# EAGLE board pro-one-oscillators (EAGLE 5.07)

Size 100 x 80 mm. Coordinates in mm from the lower left corner, seen from the top.
Outline: 0,0 100,0 100,80 0,80 0,0
Copper layers (1*16): Top 0.035mm / dielectric 1.5mm / Bottom 0.035mm
Design rules "default": minimum track width 10mil, minimum drill 24mil, track to track 8mil, track to pad 8mil, pad to pad 8mil, via to via 8mil, smd to smd 8mil, copper to edge 40mil, drill to drill 8mil, minimum pad ring 10mil, minimum via ring 8mil, stop-mask expansion 4mil, vias tented up to drill 0mil, thermal gap 10mil

## Footprints (pad centres in the part's own frame; a part is rotated, then mirrored left to right if it is on the bottom)
C050-025X075 = drill 0.813 octagon: 1 -2.54,0; 2 2.54,0
DO35-7 = drill 0.813 long: A 3.81,0; C -3.81,0
DIL16 = drill 0.813 long: 1 -8.89,-3.81; 2 -6.35,-3.81; 3 -3.81,-3.81; 4 -1.27,-3.81; 5 1.27,-3.81; 6 3.81,-3.81; 7 6.35,-3.81; 8 8.89,-3.81; 9 8.89,3.81; 10 6.35,3.81; 11 3.81,3.81; 12 1.27,3.81; 13 -1.27,3.81; 14 -3.81,3.81; 15 -6.35,3.81; 16 -8.89,3.81
DIL14 = drill 0.813 long: 1 -7.62,-3.81; 2 -5.08,-3.81; 3 -2.54,-3.81; 4 0,-3.81; 5 2.54,-3.81; 6 5.08,-3.81; 7 7.62,-3.81; 8 7.62,3.81; 9 5.08,3.81; 10 2.54,3.81; 11 0,3.81; 12 -2.54,3.81; 13 -5.08,3.81; 14 -7.62,3.81
0309/10 = drill 0.813 octagon: 1 -5.08,0; 2 5.08,0
RTRIM64W = drill 0.61 round: 1 1.27,-2.54; 2 1.27,0; 3 1.27,2.54
255SB = drill 1.118 long: 1 -3.81,0; 2 0,0; 3 3.81,0
22-23-2031 = drill 1 long: 1 -2.54,0; 2 0,0; 3 2.54,0

## Placement (x,y rotation side)
C103  0.01u  [C050-025X075]  -16.51,38.1 0 top  (outside the outline)
C104  0.1u  [C050-025X075]  -25.4,38.1 0 top  (outside the outline)
C105  1000p poly  [C050-025X075]  -77.47,26.67 0 top  (outside the outline)
C106  0.01u  [C050-025X075]  -34.29,38.1 0 top  (outside the outline)
C107  0.1u  [C050-025X075]  -43.18,38.1 0 top  (outside the outline)
C108  0.1u  [C050-025X075]  -52.07,38.1 0 top  (outside the outline)
C109  0.01u  [C050-025X075]  -60.96,38.1 0 top  (outside the outline)
C110  0.01u  [C050-025X075]  -69.85,38.1 0 top  (outside the outline)
C111  0.1u  [C050-025X075]  -78.74,38.1 0 top  (outside the outline)
C112  0.1u  [C050-025X075]  -87.63,38.1 0 top  (outside the outline)
C113  1000p poly  [C050-025X075]  -87.63,26.67 0 top  (outside the outline)
C114  0.01u  [C050-025X075]  -16.51,45.72 0 top  (outside the outline)
C115  0.1u  [C050-025X075]  -25.4,45.72 0 top  (outside the outline)
C116  0.001u  [C050-025X075]  -34.29,45.72 0 top  (outside the outline)
C117  0.001u  [C050-025X075]  -43.18,45.72 0 top  (outside the outline)
C118  0.001u  [C050-025X075]  -52.07,45.72 0 top  (outside the outline)
C119  0.001u  [C050-025X075]  -60.96,45.72 0 top  (outside the outline)
D101  1N4148DO35-7  [DO35-7]  -76.2,45.72 0 top  (outside the outline)
D102  1N4148DO35-7  [DO35-7]  -24.13,53.34 0 top  (outside the outline)
IC1  CEM3340  [DIL16]  -24.13,6.35 0 top  (outside the outline)
IC2  CEM3340  [DIL16]  -46.99,6.35 0 top  (outside the outline)
IC104  LM348  [DIL14]  -68.58,6.35 0 top  (outside the outline)
R73  100k 1%  [0309/10]  -36.83,50.8 0 top  (outside the outline)
R86  100k  [0309/10]  -49.53,50.8 0 top  (outside the outline)
R117  82k  [0309/10]  -62.23,50.8 0 top  (outside the outline)
R118  82k  [0309/10]  -74.93,50.8 0 top  (outside the outline)
R119  100k  [RTRIM64W]  -17.78,17.78 0 top  (outside the outline)
R120  100k  [RTRIM64W]  -27.94,17.78 0 top  (outside the outline)
R121  100k 1%  [0309/10]  -19.05,58.42 0 top  (outside the outline)
R122  470  [0309/10]  -31.75,58.42 0 top  (outside the outline)
R123  220k  [0309/10]  -44.45,58.42 0 top  (outside the outline)
R124  1M  [0309/10]  -57.15,58.42 0 top  (outside the outline)
R125  100k  [0309/10]  -69.85,58.42 0 top  (outside the outline)
R126  4.7M  [0309/10]  -82.55,58.42 0 top  (outside the outline)
R127  100k 1%  [0309/10]  -19.05,64.77 0 top  (outside the outline)
R128  5k  [RTRIM64W]  -38.1,17.78 0 top  (outside the outline)
R129  26.7K 1%  [0309/10]  -31.75,64.77 0 top  (outside the outline)
R130  5.62K 1%  [0309/10]  -44.45,64.77 0 top  (outside the outline)
R131  1.2M  [0309/10]  -57.15,64.77 0 top  (outside the outline)
R132  820K  [0309/10]  -69.85,64.77 0 top  (outside the outline)
R133  100k 1%  [0309/10]  -82.55,64.77 0 top  (outside the outline)
R134  1.82k 1%  [0309/10]  -19.05,71.12 0 top  (outside the outline)
R135  25k  [RTRIM64W]  -48.26,17.78 0 top  (outside the outline)
R136  470  [0309/10]  -31.75,71.12 0 top  (outside the outline)
R137  2.2M 1%  [0309/10]  -44.45,71.12 0 top  (outside the outline)
R138  47k  [0309/10]  -57.15,71.12 0 top  (outside the outline)
R139  100k  [RTRIM64W]  -58.42,17.78 0 top  (outside the outline)
R140  100k  [RTRIM64W]  -68.58,17.78 0 top  (outside the outline)
R142  100k 1%  [0309/10]  -69.85,71.12 0 top  (outside the outline)
R143  470  [0309/10]  -82.55,71.12 0 top  (outside the outline)
R144  1M  [0309/10]  -19.05,77.47 0 top  (outside the outline)
R145  100k 1%  [0309/10]  -31.75,77.47 0 top  (outside the outline)
R146  4.7M  [0309/10]  -44.45,77.47 0 top  (outside the outline)
R147  100k  [0309/10]  -57.15,77.47 0 top  (outside the outline)
R148  5k  [RTRIM64W]  -78.74,17.78 0 top  (outside the outline)
R149  26.7K 1%  [0309/10]  -69.85,77.47 0 top  (outside the outline)
R150  5.62K 1%  [0309/10]  -82.55,77.47 0 top  (outside the outline)
R153  300k 5%  [0309/10]  -19.05,83.82 0 top  (outside the outline)
R154  820K  [0309/10]  -31.75,83.82 0 top  (outside the outline)
R155  100k 1%  [0309/10]  -44.45,83.82 0 top  (outside the outline)
R156  1.82k 1%  [0309/10]  -57.15,83.82 0 top  (outside the outline)
R157  25k  [RTRIM64W]  -88.9,17.78 0 top  (outside the outline)
R158  470  [0309/10]  -69.85,83.82 0 top  (outside the outline)
R159  2.2M 1%  [0309/10]  -82.55,83.82 0 top  (outside the outline)
R165  100k  [RTRIM64W]  -17.78,29.21 0 top  (outside the outline)
R166  100k  [0309/10]  -19.05,90.17 0 top  (outside the outline)
R167  100k 1%  [0309/10]  -31.75,90.17 0 top  (outside the outline)
R168  10k  [0309/10]  -44.45,90.17 0 top  (outside the outline)
R169  100k  [0309/10]  -57.15,90.17 0 top  (outside the outline)
R170  100k  [0309/10]  -69.85,90.17 0 top  (outside the outline)
R177  20k  [0309/10]  -82.55,90.17 0 top  (outside the outline)
R178  100k  [0309/10]  -19.05,96.52 0 top  (outside the outline)
R185  100k  [0309/10]  -31.75,96.52 0 top  (outside the outline)
R187  100k  [RTRIM64W]  -27.94,29.21 0 top  (outside the outline)
R199  10k  [0309/10]  -44.45,96.52 0 top  (outside the outline)
R1210  100k  [RTRIM64W]  -38.1,29.21 0 top  (outside the outline)
R1212  820k  [0309/10]  -57.15,96.52 0 top  (outside the outline)
S116  Lo freq  [255SB]  -64.77,26.67 0 top  (outside the outline)
S117  Osc b kbd  [255SB]  -52.07,26.67 0 top  (outside the outline)
X1  22-23-2031  [22-23-2031]  -83.82,6.35 0 top  (outside the outline)

## Library data of the parts
C103-C119 R73 R86 R117-R140 R142-R150 R153-R159 R165-R170 R177 R178 R185 R187 R199 R1210 R1212 = resistor
D101 D102 = diode
IC1 IC2 IC104 = joakim
S116 S117 = switch
X1 = con-molex

## Nets
+15V: C104.1 C112.1 IC1.16 IC2.16 IC104.4 R118.2 R119.3 R120.3 R123.2 R137.2 R139.3 R140.3 R159.2 R1210.3 R1212.2
-5V: C107.1 C111.1 IC1.3 IC2.3 R120.1 R128.1 R130.1 R140.1 R148.1 R150.1 R165.3 R187.3
-15V: IC104.11 R117.2 R177.1 S116.2
GND: C103.2 C104.2 C105.2 C106.2 C107.2 C108.2 C109.2 C110.2 C111.2 C112.2 C113.2 C114.2 C115.2 IC1.12 IC2.12 IC104.3 IC104.5 IC104.10 IC104.12 R119.1 R134.1 R135.3 R156.1 R157.3 R165.1 R187.1 R199.1 R1210.1 S117.1
KYBD_CV: R121.1 S117.3
MOD_TO_OSC_A_FREQ: R125.1
MOD_TO_OSC_A_PW: R166.1
MOD_TO_OSC_B_FREQ: R147.1
MOD_TO_OSC_B_PW: R185.1
N$1: IC1.1 R129.2
N$2: IC1.2 R130.2
N$3: IC1.13 R136.2 R137.1
N$4: IC1.15 R122.2 R123.1 R132.2
N$5: R128.2 R128.3 R129.1
N$6: C106.1 R136.1
N$7: C108.1 IC1.9 R138.1
N$8: IC1.7 R135.1
N$9: R132.1 R135.2
N$10: C103.1 R122.1
N$11: C105.1 IC1.11
N$12: IC1.14 R134.2
N$13: IC1.4 R168.1
N$14: R168.2 R177.2
N$15: IC2.1 R149.2
N$16: IC2.2 R150.2
N$17: IC2.13 R158.2 R159.1
N$18: R139.1 S116.3
N$19: R148.2 R148.3 R149.1
N$20: IC2.7 R157.1
N$21: R154.1 R157.2
N$22: C114.1 R158.1
N$23: C109.1 R143.1
N$24: IC2.14 R156.2
N$25: IC2.4
N$26: R199.2
N$27: C115.1 IC2.9
N$28: C113.1 IC2.11
N$29: R126.1 R146.1 R1210.2
N$30: R140.2 R144.1
N$31: D101.A D102.C R127.1 R145.1
N$32: C110.1 R139.2 R153.1
N$33: R165.2 R169.1
N$34: C118.2 IC1.5 IC104.8 R170.2
N$35: R121.2 R124.2 R125.2 R126.2 R127.2 R131.2 R133.2
N$36: C118.1 IC104.9 R166.2 R169.2 R170.1
N$37: R86.1 R187.2
N$38: C119.1 IC104.6 R86.2 R178.1 R185.2
N$39: C119.2 IC2.5 IC104.7 R178.2
N$40: C116.2 IC104.1 R73.2 R155.1
N$41: IC2.15 R142.2 R143.2 R144.2 R145.2 R146.2 R147.2 R153.2 R154.2 R155.2 R1212.1
N$42: R142.1 S117.2
N$43: R120.2 R124.1
N$44: C116.1 IC104.2 R73.1
N$45: D101.C D102.A X1.3
N$46: C117.2 IC104.14 R133.1 R167.2
N$47: C117.1 IC104.13 R167.1
N$48: R118.1 X1.1
N$49: R117.1 X1.2
N$50: R119.2 R131.1

## Tracks (layer width: path | path; a pad name or v marks a point on that pad's centre or on a via)
+15V  (14 unrouted)
-5V  (11 unrouted)
-15V  (3 unrouted)
GND  (28 unrouted)
KYBD_CV  (1 unrouted)
N$1  (1 unrouted)
N$2  (1 unrouted)
N$3  (2 unrouted)
N$4  (3 unrouted)
N$5  (2 unrouted)
N$6  (1 unrouted)
N$7  (2 unrouted)
N$8  (1 unrouted)
N$9  (1 unrouted)
N$10  (1 unrouted)
N$11  (1 unrouted)
N$12  (1 unrouted)
N$13  (1 unrouted)
N$14  (1 unrouted)
N$15  (1 unrouted)
N$16  (1 unrouted)
N$17  (2 unrouted)
N$18  (1 unrouted)
N$19  (2 unrouted)
N$20  (1 unrouted)
N$21  (1 unrouted)
N$22  (1 unrouted)
N$23  (1 unrouted)
N$24  (1 unrouted)
N$27  (1 unrouted)
N$28  (1 unrouted)
N$29  (2 unrouted)
N$30  (1 unrouted)
N$31  (3 unrouted)
N$32  (2 unrouted)
N$33  (1 unrouted)
N$34  (3 unrouted)
N$35  (6 unrouted)
N$36  (4 unrouted)
N$37  (1 unrouted)
N$38  (4 unrouted)
N$39  (3 unrouted)
N$40  (3 unrouted)
N$41  (10 unrouted)
N$42  (1 unrouted)
N$43  (1 unrouted)
N$44  (2 unrouted)
N$45  (2 unrouted)
N$46  (3 unrouted)
N$47  (2 unrouted)
N$48  (1 unrouted)
N$49  (1 unrouted)
N$50  (1 unrouted)